# Altium PCB dev_board_3DM-CV7-AR.PcbDoc
Units mm, origin at the board's own origin, x right, y up, seen from the top; angles counter-clockwise.
Board outline 49.67 x 41.99 mm, 4 copper layers (F.Cu, In1.Cu, In2.Cu, B.Cu); 30 components, 27 nets, 122 pads, 7 vias.
Unrouted connection lines stored in the file: 9.
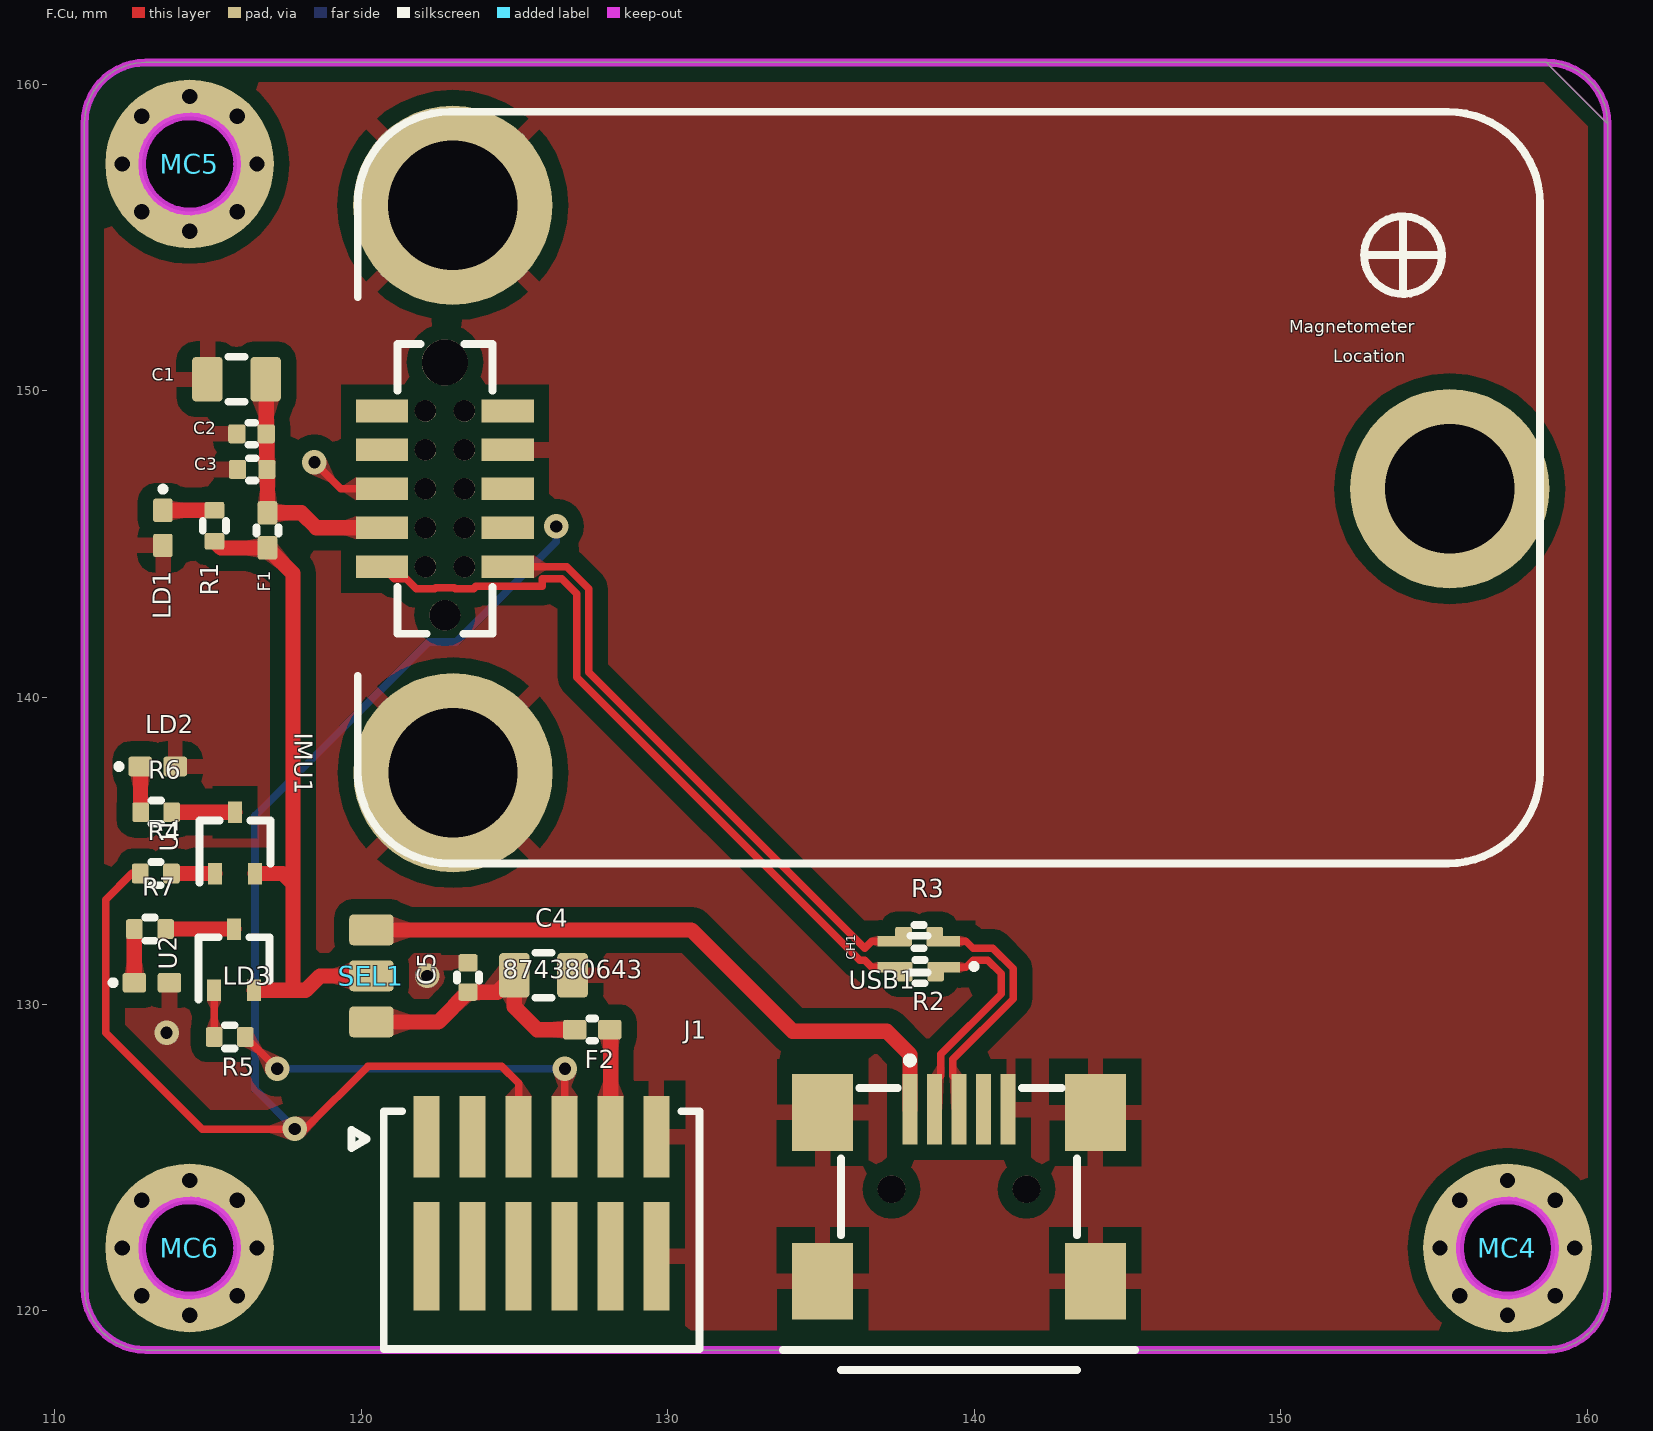
[diagram p0: F.Cu view]
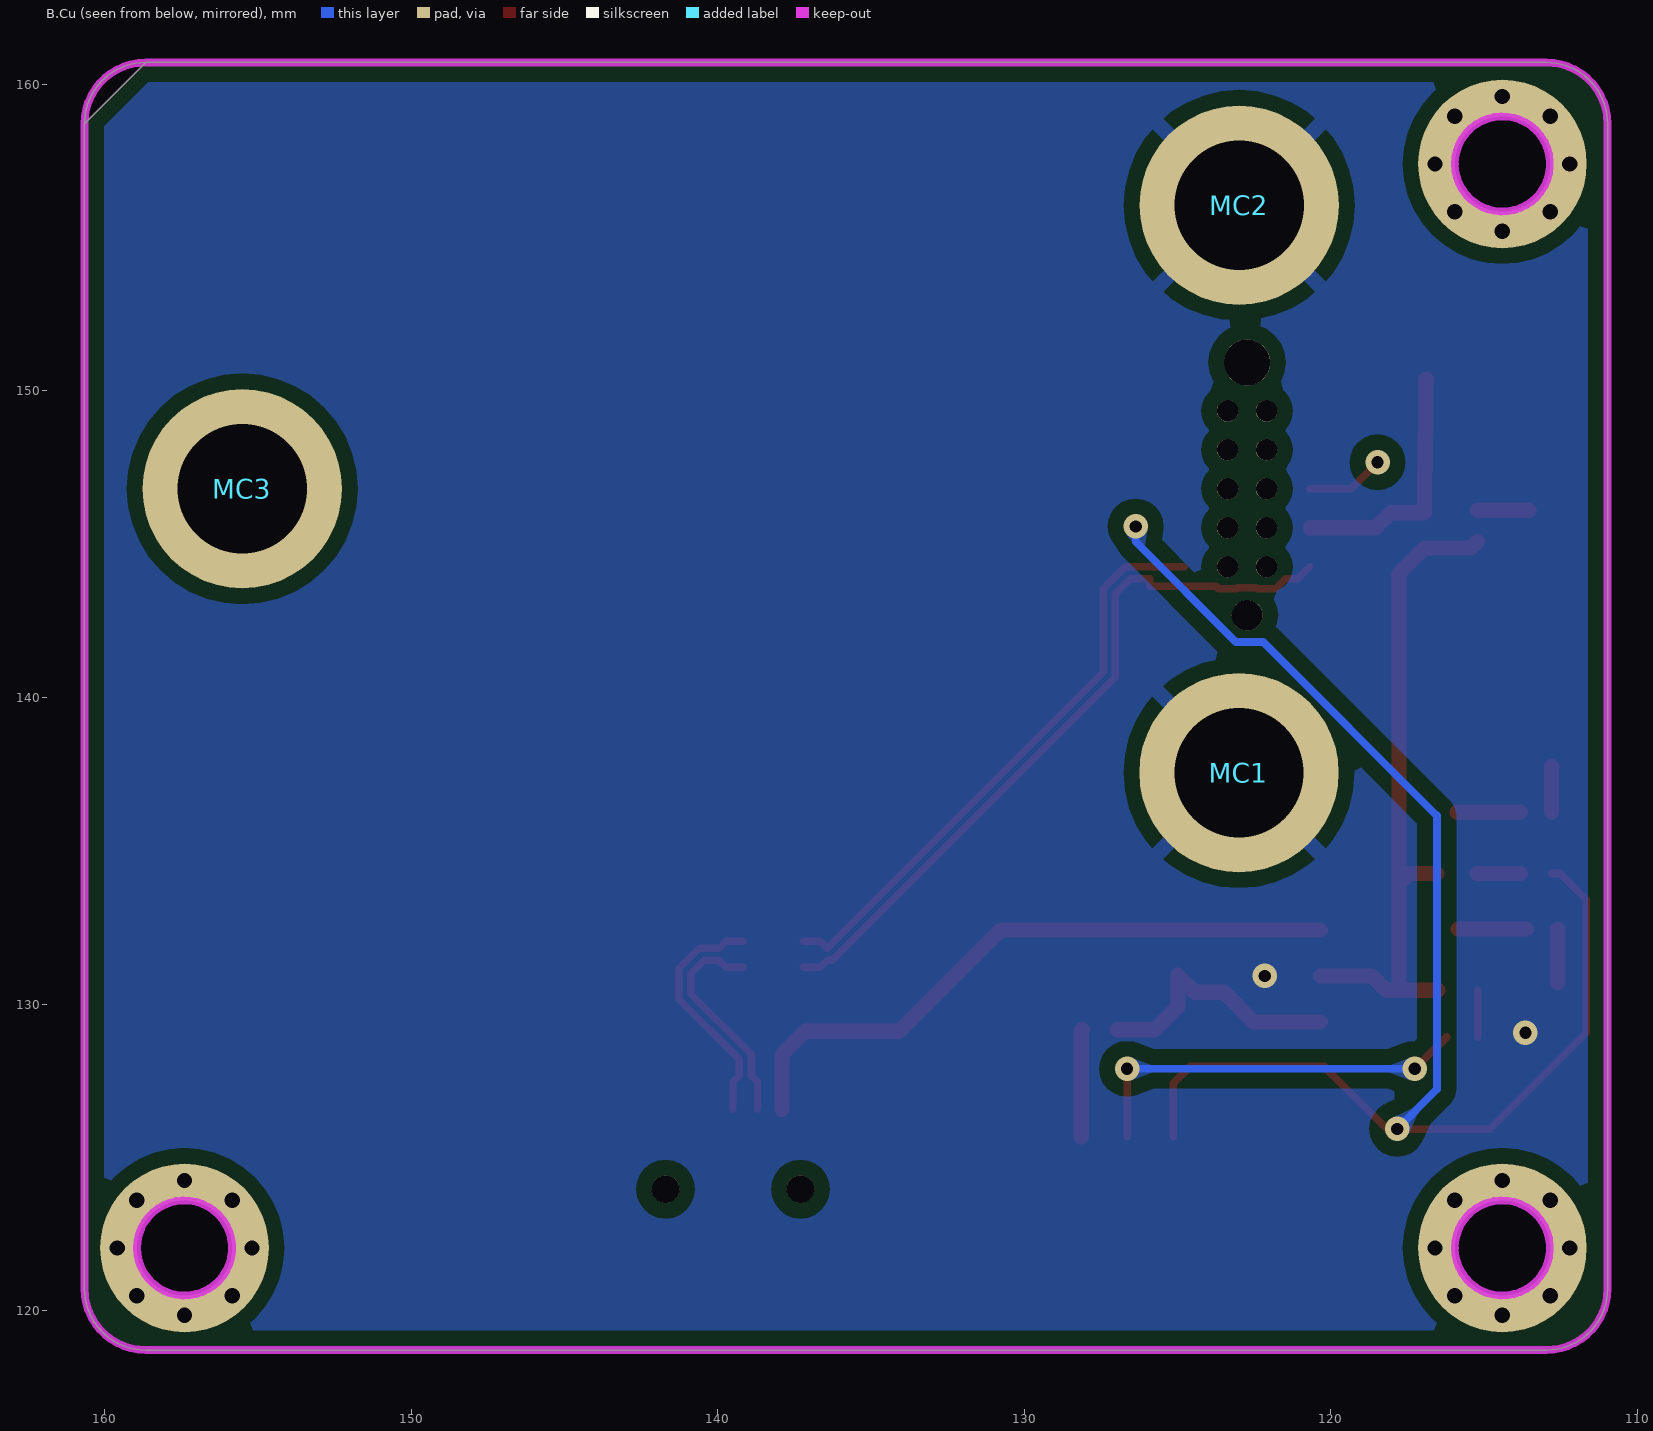
[diagram p1: B.Cu view, seen from below]
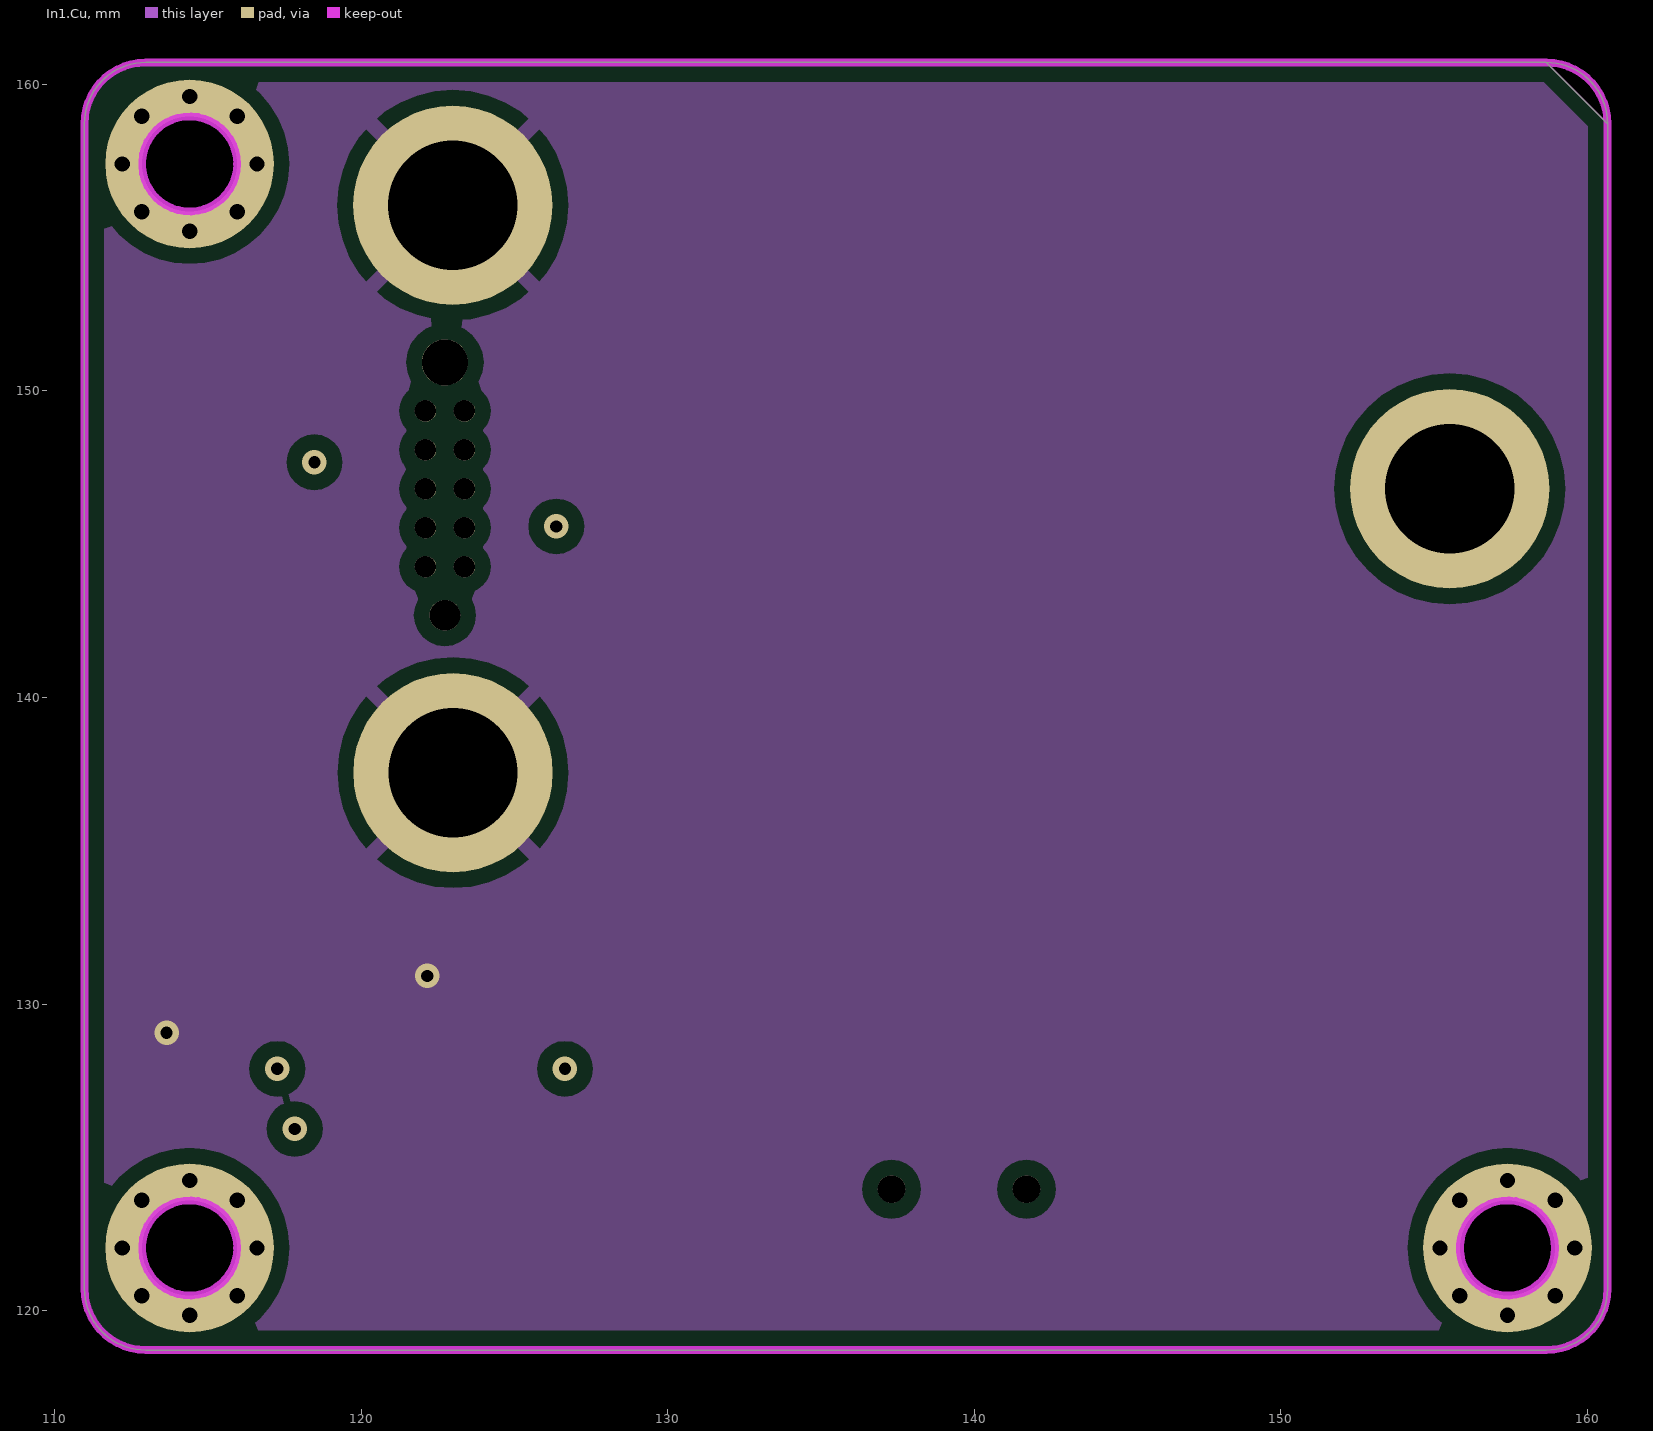
[diagram p2: In1.Cu]
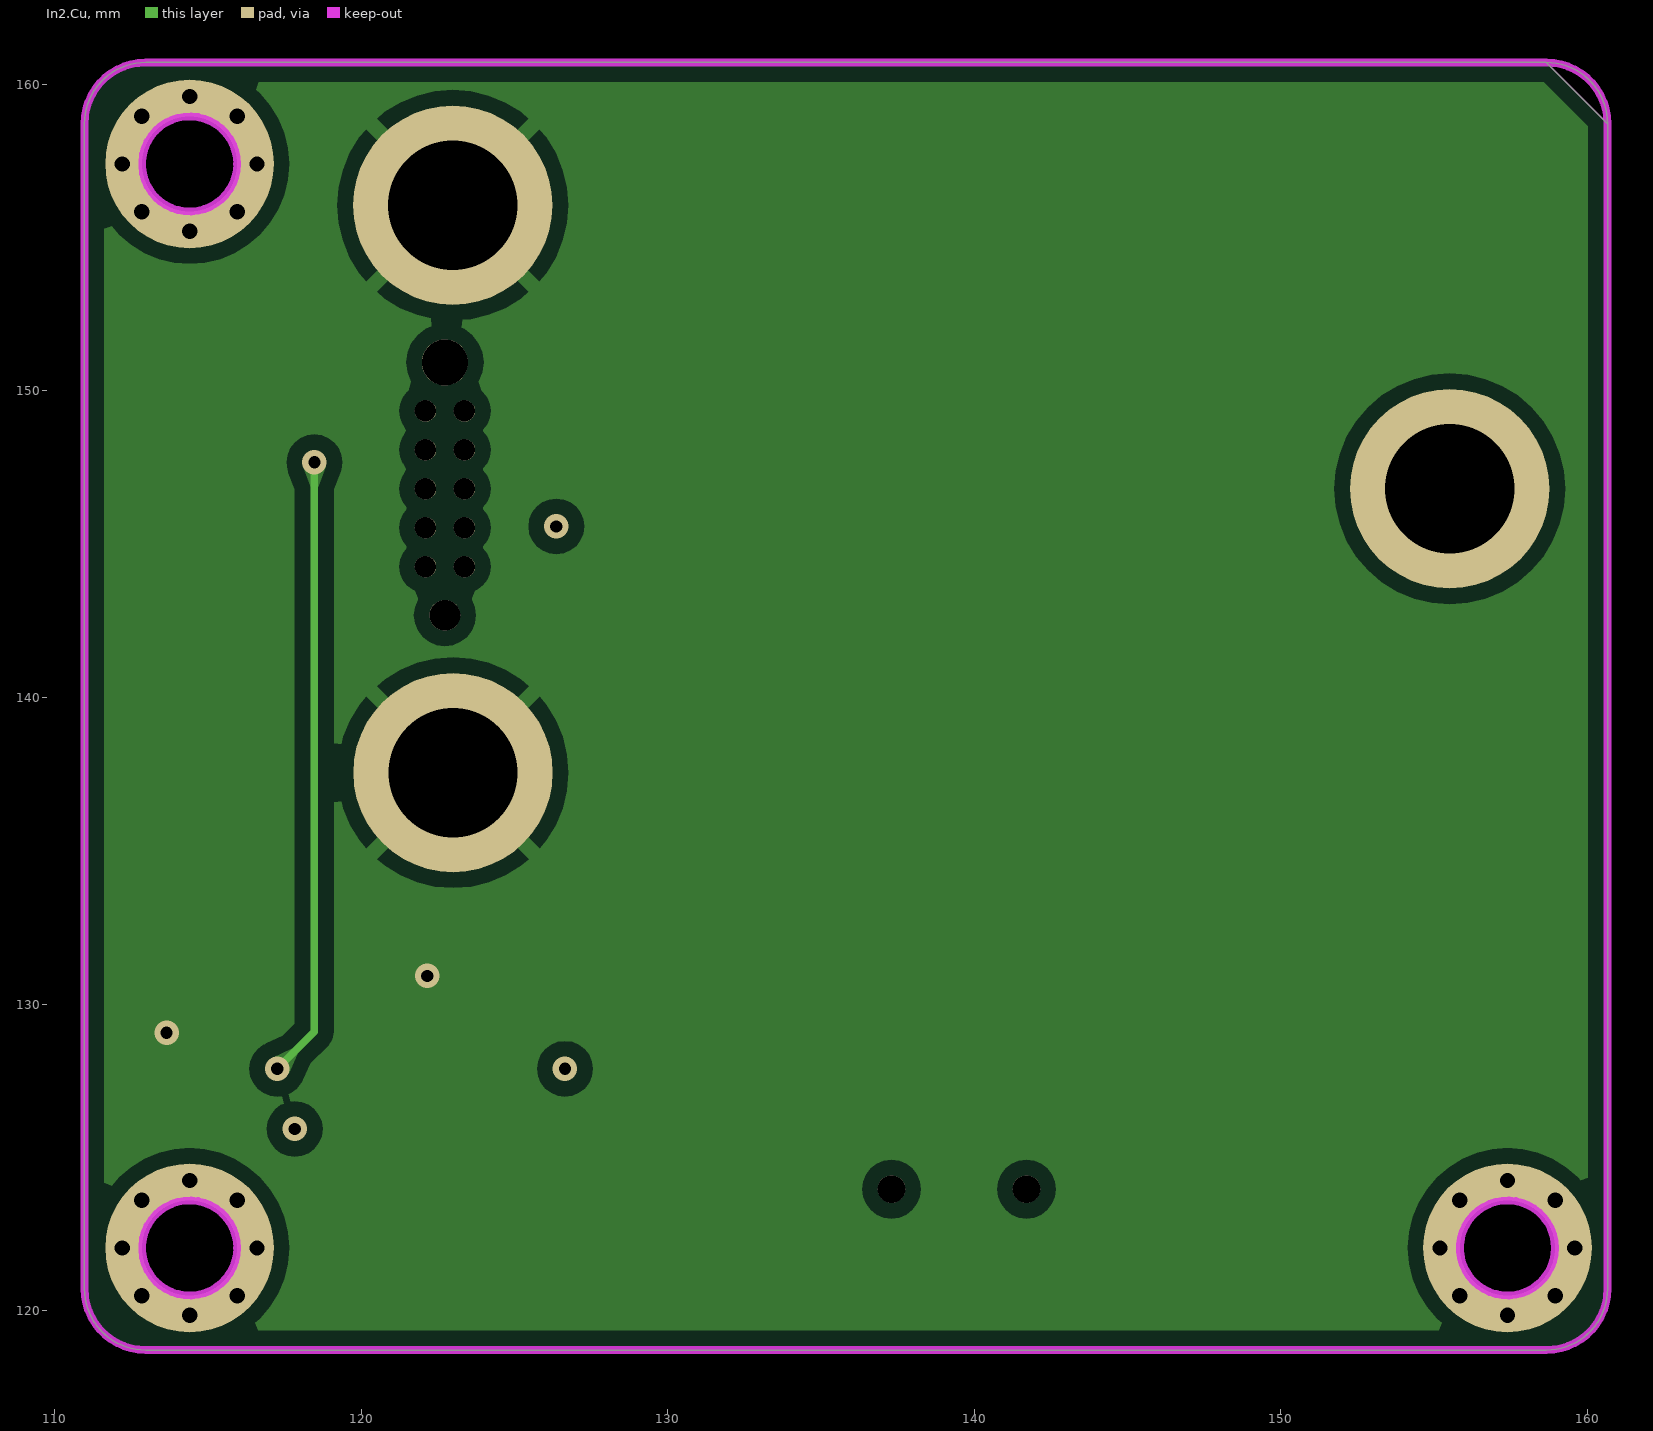
[diagram p3: In2.Cu]

## Layer stack, top to bottom
F.Mask: solder mask 0.0102, Solder Resist, Dk 3.5
F.Cu: signal copper 0.0356
Dielectric 1: dielectric 0.32, FR-4, Dk 4.8
In1.Cu: signal copper 0.0356
Dielectric2: dielectric 0.32, FR-4, Dk 4.8
In2.Cu: signal copper 0.0356
Dielectric3: dielectric 0.32, FR-4, Dk 4.8
B.Cu: signal copper 0.0356
B.Mask: solder mask 0.0102, Solder Resist, Dk 3.5

## Board outline
158.65,160.71 cw(c158.65,158.71) 160.65,158.71 160.65,120.72 cw(c158.65,120.72) 158.65,118.72 112.98,118.72 cw(c112.98,120.72) 110.98,120.72 110.98,158.71 cw(c112.98,158.71) 112.98,160.71 158.65,160.71 cw(c158.65,158.71) 158.65,160.71
cut-out: 115.653,156.471 115.705,156.535 115.849,156.804 115.938,157.096 115.967,157.4 115.938,157.704 115.849,157.996 115.705,158.265 115.511,158.501 115.339,158.643 115.275,158.695 115.006,158.839 114.714,158.928 114.41,158.958 114.106,158.928 113.814,158.839 113.545,158.695 113.309,158.501 113.167,158.329 113.115,158.265 112.971,157.996 112.882,157.704 112.852,157.4 112.882,157.096 112.971,156.804 113.115,156.535 113.309,156.299 113.481,156.157 113.545,156.105 113.814,155.961 114.106,155.872 114.41,155.843 114.714,155.872 115.006,155.961 115.275,156.105 115.511,156.299 115.653,156.471
cut-out: 115.48,120.923 115.511,120.949 115.705,121.185 115.849,121.454 115.938,121.746 115.967,122.05 115.938,122.354 115.849,122.646 115.705,122.915 115.537,123.12 115.511,123.151 115.275,123.345 115.006,123.489 114.714,123.578 114.41,123.607 114.106,123.578 113.814,123.489 113.545,123.345 113.34,123.177 113.309,123.151 113.115,122.915 112.971,122.646 112.882,122.354 112.852,122.05 112.882,121.746 112.971,121.454 113.115,121.185 113.283,120.98 113.309,120.949 113.545,120.755 113.814,120.611 114.106,120.522 114.41,120.492 114.714,120.522 115.006,120.611 115.275,120.755 115.48,120.923
cut-out: 158.614,121.105 158.679,121.185 158.823,121.454 158.912,121.746 158.942,122.05 158.912,122.354 158.823,122.646 158.679,122.915 158.486,123.151 158.329,123.28 158.25,123.345 157.98,123.489 157.688,123.578 157.384,123.607 157.081,123.578 156.788,123.489 156.519,123.345 156.283,123.151 156.154,122.995 156.089,122.915 155.945,122.646 155.857,122.354 155.827,122.05 155.857,121.746 155.945,121.454 156.089,121.185 156.283,120.949 156.44,120.82 156.519,120.755 156.788,120.611 157.081,120.522 157.384,120.492 157.688,120.522 157.98,120.611 158.25,120.755 158.486,120.949 158.614,121.105

## Design rules (kind name [scope] priority, off if disabled: settings)
Clearance "Clearence 0,5_Polygon" [InNamedPolygon('F.Cu-GND') OR InNamedPolygon('In1.Cu-GND') OR InNamedPolygon('In2.Cu-GND') OR InNamedPolygon('B.Cu-GND')] p1: gap=0.5 ignorepadtopadclearanceinfootprint=FALSE
MinimumSolderMaskSliver [All] p1: minsoldermaskwidth=0
PolygonConnect Polygon_B.Cu-/Rx-1_ConnectDirect [IsNamedPolygon('B.Cu-/Rx-1')] p1: connectstyle=Direct reliefconductorwidth=0.254 reliefentries=4 polygonreliefangle="90 Angle" airgapwidth=0.254
PolygonConnect Polygon_B.Cu-/Tx-1_ConnectDirect [IsNamedPolygon('B.Cu-/Tx-1')] p2: connectstyle=Direct reliefconductorwidth=0.254 reliefentries=4 polygonreliefangle="90 Angle" airgapwidth=0.254
PolygonConnect Polygon_B.Cu-/Tx_ConnectDirect [IsNamedPolygon('B.Cu-/Tx')] p3: connectstyle=Direct reliefconductorwidth=0.254 reliefentries=4 polygonreliefangle="90 Angle" airgapwidth=0.254
PolygonConnect Polygon_B.Cu-/Rx_ConnectDirect [IsNamedPolygon('B.Cu-/Rx')] p4: connectstyle=Direct reliefconductorwidth=0.254 reliefentries=4 polygonreliefangle="90 Angle" airgapwidth=0.254
PolygonConnect Polygon_In2.Cu-/Tx-1_ConnectDirect [IsNamedPolygon('In2.Cu-/Tx-1')] p5: connectstyle=Direct reliefconductorwidth=0.254 reliefentries=4 polygonreliefangle="90 Angle" airgapwidth=0.254
PolygonConnect Polygon_In2.Cu-/Tx_ConnectDirect [IsNamedPolygon('In2.Cu-/Tx')] p6: connectstyle=Direct reliefconductorwidth=0.254 reliefentries=4 polygonreliefangle="90 Angle" airgapwidth=0.254
PolygonConnect Polygon_B.Cu-GND_ConnectDirect [IsNamedPolygon('B.Cu-GND') vs IsVia] p7: connectstyle=Direct reliefconductorwidth=0.254 reliefentries=4 polygonreliefangle="90 Angle" airgapwidth=0.254
PolygonConnect Polygon_B.Cu-GND_ConnectRelief45 [IsNamedPolygon('B.Cu-GND') vs (IsThruPin or IsSMTPin) and (PadShape_AllLayers = 'Round')] p8: connectstyle=Relief reliefconductorwidth=0.5 reliefentries=4 polygonreliefangle="45 Angle" airgapwidth=0.5
PolygonConnect Polygon_B.Cu-GND_ConnectRelief90 [IsNamedPolygon('B.Cu-GND') vs (IsThruPin or IsSMTPin) and (PadShape_AllLayers <> 'Round')] p9: connectstyle=Relief reliefconductorwidth=0.5 reliefentries=4 polygonreliefangle="90 Angle" airgapwidth=0.5
PolygonConnect Polygon_In2.Cu-GND_ConnectDirect [IsNamedPolygon('In2.Cu-GND') vs IsVia] p10: connectstyle=Direct reliefconductorwidth=0.254 reliefentries=4 polygonreliefangle="90 Angle" airgapwidth=0.254
PolygonConnect Polygon_In2.Cu-GND_ConnectRelief45 [IsNamedPolygon('In2.Cu-GND') vs (IsThruPin or IsSMTPin) and (PadShape_AllLayers = 'Round')] p11: connectstyle=Relief reliefconductorwidth=0.5 reliefentries=4 polygonreliefangle="45 Angle" airgapwidth=0.5
PolygonConnect Polygon_In2.Cu-GND_ConnectRelief90 [IsNamedPolygon('In2.Cu-GND') vs (IsThruPin or IsSMTPin) and (PadShape_AllLayers <> 'Round')] p12: connectstyle=Relief reliefconductorwidth=0.5 reliefentries=4 polygonreliefangle="90 Angle" airgapwidth=0.5
PolygonConnect Polygon_In1.Cu-GND_ConnectDirect [IsNamedPolygon('In1.Cu-GND') vs IsVia] p13: connectstyle=Direct reliefconductorwidth=0.254 reliefentries=4 polygonreliefangle="90 Angle" airgapwidth=0.254
PolygonConnect Polygon_In1.Cu-GND_ConnectRelief45 [IsNamedPolygon('In1.Cu-GND') vs (IsThruPin or IsSMTPin) and (PadShape_AllLayers = 'Round')] p14: connectstyle=Relief reliefconductorwidth=0.5 reliefentries=4 polygonreliefangle="45 Angle" airgapwidth=0.5
PolygonConnect Polygon_In1.Cu-GND_ConnectRelief90 [IsNamedPolygon('In1.Cu-GND') vs (IsThruPin or IsSMTPin) and (PadShape_AllLayers <> 'Round')] p15: connectstyle=Relief reliefconductorwidth=0.5 reliefentries=4 polygonreliefangle="90 Angle" airgapwidth=0.5
PolygonConnect Polygon_F.Cu-GND_ConnectDirect [IsNamedPolygon('F.Cu-GND') vs IsVia] p16: connectstyle=Direct reliefconductorwidth=0.254 reliefentries=4 polygonreliefangle="90 Angle" airgapwidth=0.254
PolygonConnect Polygon_F.Cu-GND_ConnectRelief45 [IsNamedPolygon('F.Cu-GND') vs (IsThruPin or IsSMTPin) and (PadShape_AllLayers = 'Round')] p17: connectstyle=Relief reliefconductorwidth=0.5 reliefentries=4 polygonreliefangle="45 Angle" airgapwidth=0.5
PolygonConnect Polygon_F.Cu-GND_ConnectRelief90 [IsNamedPolygon('F.Cu-GND') vs (IsThruPin or IsSMTPin) and (PadShape_AllLayers <> 'Round')] p18: connectstyle=Relief reliefconductorwidth=0.5 reliefentries=4 polygonreliefangle="90 Angle" airgapwidth=0.5
PolygonConnect Polygon_F.Cu-/Rx-2_ConnectDirect [IsNamedPolygon('F.Cu-/Rx-2')] p19: connectstyle=Direct reliefconductorwidth=0.254 reliefentries=4 polygonreliefangle="90 Angle" airgapwidth=0.254
PolygonConnect Polygon_F.Cu-+5V-5_ConnectDirect [IsNamedPolygon('F.Cu-+5V-5')] p20: connectstyle=Direct reliefconductorwidth=0.254 reliefentries=4 polygonreliefangle="90 Angle" airgapwidth=0.254
PolygonConnect Polygon_F.Cu-Net-(IMU1-VCC)-7_ConnectDirect [IsNamedPolygon('F.Cu-Net-(IMU1-VCC)-7')] p21: connectstyle=Direct reliefconductorwidth=0.254 reliefentries=4 polygonreliefangle="90 Angle" airgapwidth=0.254
PolygonConnect Polygon_F.Cu-/D_conn--1_ConnectDirect [IsNamedPolygon('F.Cu-/D_conn--1')] p22: connectstyle=Direct reliefconductorwidth=0.254 reliefentries=4 polygonreliefangle="90 Angle" airgapwidth=0.254
PolygonConnect Polygon_F.Cu-+5V-4_ConnectDirect [IsNamedPolygon('F.Cu-+5V-4')] p23: connectstyle=Direct reliefconductorwidth=0.254 reliefentries=4 polygonreliefangle="90 Angle" airgapwidth=0.254
PolygonConnect Polygon_F.Cu-Net-(IMU1-VCC)-6_ConnectDirect [IsNamedPolygon('F.Cu-Net-(IMU1-VCC)-6')] p24: connectstyle=Direct reliefconductorwidth=0.254 reliefentries=4 polygonreliefangle="90 Angle" airgapwidth=0.254
PolygonConnect Polygon_F.Cu-/Tx-5_ConnectDirect [IsNamedPolygon('F.Cu-/Tx-5')] p25: connectstyle=Direct reliefconductorwidth=0.254 reliefentries=4 polygonreliefangle="90 Angle" airgapwidth=0.254
PolygonConnect Polygon_F.Cu-+5VD-2_ConnectDirect [IsNamedPolygon('F.Cu-+5VD-2')] p26: connectstyle=Direct reliefconductorwidth=0.254 reliefentries=4 polygonreliefangle="90 Angle" airgapwidth=0.254
PolygonConnect Polygon_F.Cu-/D+-1_ConnectDirect [IsNamedPolygon('F.Cu-/D+-1')] p27: connectstyle=Direct reliefconductorwidth=0.254 reliefentries=4 polygonreliefangle="90 Angle" airgapwidth=0.254
PolygonConnect Polygon_F.Cu-/D_conn-_ConnectDirect [IsNamedPolygon('F.Cu-/D_conn-')] p28: connectstyle=Direct reliefconductorwidth=0.254 reliefentries=4 polygonreliefangle="90 Angle" airgapwidth=0.254
PolygonConnect Polygon_F.Cu-/D_conn+-1_ConnectDirect [IsNamedPolygon('F.Cu-/D_conn+-1')] p29: connectstyle=Direct reliefconductorwidth=0.254 reliefentries=4 polygonreliefangle="90 Angle" airgapwidth=0.254
PolygonConnect Polygon_F.Cu-+5V-3_ConnectDirect [IsNamedPolygon('F.Cu-+5V-3')] p30: connectstyle=Direct reliefconductorwidth=0.254 reliefentries=4 polygonreliefangle="90 Angle" airgapwidth=0.254
PolygonConnect Polygon_F.Cu-/Tx-4_ConnectDirect [IsNamedPolygon('F.Cu-/Tx-4')] p31: connectstyle=Direct reliefconductorwidth=0.254 reliefentries=4 polygonreliefangle="90 Angle" airgapwidth=0.254
PolygonConnect Polygon_F.Cu-/D_conn+_ConnectDirect [IsNamedPolygon('F.Cu-/D_conn+')] p32: connectstyle=Direct reliefconductorwidth=0.254 reliefentries=4 polygonreliefangle="90 Angle" airgapwidth=0.254
PolygonConnect Polygon_F.Cu-Net-(LD1-A)_ConnectDirect [IsNamedPolygon('F.Cu-Net-(LD1-A)')] p33: connectstyle=Direct reliefconductorwidth=0.254 reliefentries=4 polygonreliefangle="90 Angle" airgapwidth=0.254
PolygonConnect Polygon_F.Cu-Net-(IMU1-VCC)-5_ConnectDirect [IsNamedPolygon('F.Cu-Net-(IMU1-VCC)-5')] p34: connectstyle=Direct reliefconductorwidth=0.254 reliefentries=4 polygonreliefangle="90 Angle" airgapwidth=0.254
PolygonConnect Polygon_F.Cu-Net-(LD3-A)_ConnectDirect [IsNamedPolygon('F.Cu-Net-(LD3-A)')] p35: connectstyle=Direct reliefconductorwidth=0.254 reliefentries=4 polygonreliefangle="90 Angle" airgapwidth=0.254
PolygonConnect Polygon_F.Cu-VBUS_ConnectDirect [IsNamedPolygon('F.Cu-VBUS')] p36: connectstyle=Direct reliefconductorwidth=0.254 reliefentries=4 polygonreliefangle="90 Angle" airgapwidth=0.254
PolygonConnect Polygon_F.Cu-Net-(J1-Pin_5)-1_ConnectDirect [IsNamedPolygon('F.Cu-Net-(J1-Pin_5)-1')] p37: connectstyle=Direct reliefconductorwidth=0.254 reliefentries=4 polygonreliefangle="90 Angle" airgapwidth=0.254
PolygonConnect Polygon_F.Cu-/Rx-1_ConnectDirect [IsNamedPolygon('F.Cu-/Rx-1')] p38: connectstyle=Direct reliefconductorwidth=0.254 reliefentries=4 polygonreliefangle="90 Angle" airgapwidth=0.254
PolygonConnect Polygon_F.Cu-/D-_ConnectDirect [IsNamedPolygon('F.Cu-/D-')] p39: connectstyle=Direct reliefconductorwidth=0.254 reliefentries=4 polygonreliefangle="90 Angle" airgapwidth=0.254
PolygonConnect Polygon_F.Cu-Net-(IMU1-VCC)-4_ConnectDirect [IsNamedPolygon('F.Cu-Net-(IMU1-VCC)-4')] p40: connectstyle=Direct reliefconductorwidth=0.254 reliefentries=4 polygonreliefangle="90 Angle" airgapwidth=0.254
PolygonConnect Polygon_F.Cu-Net-(IMU1-VCC)-3_ConnectDirect [IsNamedPolygon('F.Cu-Net-(IMU1-VCC)-3')] p41: connectstyle=Direct reliefconductorwidth=0.254 reliefentries=4 polygonreliefangle="90 Angle" airgapwidth=0.254
PolygonConnect Polygon_F.Cu-Net-(J1-Pin_5)_ConnectDirect [IsNamedPolygon('F.Cu-Net-(J1-Pin_5)')] p42: connectstyle=Direct reliefconductorwidth=0.254 reliefentries=4 polygonreliefangle="90 Angle" airgapwidth=0.254
PolygonConnect Polygon_F.Cu-Net-(IMU1-VCC)-2_ConnectDirect [IsNamedPolygon('F.Cu-Net-(IMU1-VCC)-2')] p43: connectstyle=Direct reliefconductorwidth=0.254 reliefentries=4 polygonreliefangle="90 Angle" airgapwidth=0.254
PolygonConnect Polygon_F.Cu-+5V-2_ConnectDirect [IsNamedPolygon('F.Cu-+5V-2')] p44: connectstyle=Direct reliefconductorwidth=0.254 reliefentries=4 polygonreliefangle="90 Angle" airgapwidth=0.254
PolygonConnect Polygon_F.Cu-/Tx-3_ConnectDirect [IsNamedPolygon('F.Cu-/Tx-3')] p45: connectstyle=Direct reliefconductorwidth=0.254 reliefentries=4 polygonreliefangle="90 Angle" airgapwidth=0.254
PolygonConnect Polygon_F.Cu-+5V-1_ConnectDirect [IsNamedPolygon('F.Cu-+5V-1')] p46: connectstyle=Direct reliefconductorwidth=0.254 reliefentries=4 polygonreliefangle="90 Angle" airgapwidth=0.254
PolygonConnect Polygon_F.Cu-/Rx_ConnectDirect [IsNamedPolygon('F.Cu-/Rx')] p47: connectstyle=Direct reliefconductorwidth=0.254 reliefentries=4 polygonreliefangle="90 Angle" airgapwidth=0.254
PolygonConnect Polygon_F.Cu-Net-(U2-G)-1_ConnectDirect [IsNamedPolygon('F.Cu-Net-(U2-G)-1')] p48: connectstyle=Direct reliefconductorwidth=0.254 reliefentries=4 polygonreliefangle="90 Angle" airgapwidth=0.254
PolygonConnect Polygon_F.Cu-/Tx-2_ConnectDirect [IsNamedPolygon('F.Cu-/Tx-2')] p49: connectstyle=Direct reliefconductorwidth=0.254 reliefentries=4 polygonreliefangle="90 Angle" airgapwidth=0.254
PolygonConnect Polygon_F.Cu-Net-(IMU1-VCC)-1_ConnectDirect [IsNamedPolygon('F.Cu-Net-(IMU1-VCC)-1')] p50: connectstyle=Direct reliefconductorwidth=0.254 reliefentries=4 polygonreliefangle="90 Angle" airgapwidth=0.254
PolygonConnect Polygon_F.Cu-/Tx-1_ConnectDirect [IsNamedPolygon('F.Cu-/Tx-1')] p51: connectstyle=Direct reliefconductorwidth=0.254 reliefentries=4 polygonreliefangle="90 Angle" airgapwidth=0.254
PolygonConnect Polygon_F.Cu-/D+_ConnectDirect [IsNamedPolygon('F.Cu-/D+')] p52: connectstyle=Direct reliefconductorwidth=0.254 reliefentries=4 polygonreliefangle="90 Angle" airgapwidth=0.254
PolygonConnect Polygon_F.Cu-Net-(U2-G)_ConnectDirect [IsNamedPolygon('F.Cu-Net-(U2-G)')] p53: connectstyle=Direct reliefconductorwidth=0.254 reliefentries=4 polygonreliefangle="90 Angle" airgapwidth=0.254
PolygonConnect Polygon_F.Cu-+5VD-1_ConnectDirect [IsNamedPolygon('F.Cu-+5VD-1')] p54: connectstyle=Direct reliefconductorwidth=0.254 reliefentries=4 polygonreliefangle="90 Angle" airgapwidth=0.254
PolygonConnect Polygon_F.Cu-+5V_ConnectDirect [IsNamedPolygon('F.Cu-+5V')] p55: connectstyle=Direct reliefconductorwidth=0.254 reliefentries=4 polygonreliefangle="90 Angle" airgapwidth=0.254
PolygonConnect Polygon_F.Cu-Net-(LD2-A)_ConnectDirect [IsNamedPolygon('F.Cu-Net-(LD2-A)')] p56: connectstyle=Direct reliefconductorwidth=0.254 reliefentries=4 polygonreliefangle="90 Angle" airgapwidth=0.254
PolygonConnect Polygon_F.Cu-Net-(IMU1-VCC)_ConnectDirect [IsNamedPolygon('F.Cu-Net-(IMU1-VCC)')] p57: connectstyle=Direct reliefconductorwidth=0.254 reliefentries=4 polygonreliefangle="90 Angle" airgapwidth=0.254
PolygonConnect Polygon_F.Cu-/Tx_ConnectDirect [IsNamedPolygon('F.Cu-/Tx')] p58: connectstyle=Direct reliefconductorwidth=0.254 reliefentries=4 polygonreliefangle="90 Angle" airgapwidth=0.254
PolygonConnect Polygon_F.Cu-+5VD_ConnectDirect [IsNamedPolygon('F.Cu-+5VD')] p59: connectstyle=Direct reliefconductorwidth=0.254 reliefentries=4 polygonreliefangle="90 Angle" airgapwidth=0.254
RoutingVias [All] p1: holewidth=0.711 width=1.27 viastyle="Through Hole" minholewidth=0.711 minwidth=1.27 maxholewidth=0.711 maxwidth=1.27
SilkToSilkClearance [All] p1: silktosilkclearance=0
SilkToSolderMaskClearance [IsPad] p1: minsilkscreentomaskgap=0 clearancetoexposedcopper=TRUE
SolderMaskExpansion [All] p1: expansion=0.102 istentingtop=FALSE
Width [All] p1: maxlimit=10 minlimit=0.254 preferedwidth=0.254 midlayer1_maxwidth=0.254 minimp=50.000000 maximp=50.000000 favimp=50.000000
27 further rules are at their usual default settings.

## Components (designator, comment, footprint, x,y, rotation, side; value= is the part's Value field where it differs from the comment)
C1 "0.1uF" C_0805_2012Metric 115.94,150.38 r180 top
C2 "0.1uF" C_0402_1005Metric 116.43,148.6 r180 top
C3 "10pf" C_0402_1005Metric 116.45,147.44 r180 top
C4 "0.1uF" C_0805_2012Metric 125.949,130.941 r0 top
C5 "0.1uF" C_0402_1005Metric 123.49,130.87 r90 top
CH1 "~" XFMR_CM0805D900R-10 138.19,131.63 r180 top
F1 "~" L_0402_1005Metric_Pad0.77x0.64mm_HandSolder 116.95,145.45 r90 top
F2 "~" L_0402_1005Metric_Pad0.77x0.64mm_HandSolder 127.54,129.17 r180 top
IMU1 "SMD" 3DM-CV7 122.99,137.56 r0 top
J1 "87438-0643" Molex_picoSPOX_87438-3.5A_1x6_P1.5mm_Horizontal 125.949,130.941 r0 top
LD1 "LED_Generic" LED_0402_1005Metric_Pad0.77x0.64mm_HandSolder 113.54,145.53 r270 top
LD2 "LED_Generic" LED_0402_1005Metric_Pad0.77x0.64mm_HandSolder 113.37,137.75 r0 top
LD3 "LED_Generic" LED_0402_1005Metric_Pad0.77x0.64mm_HandSolder 113.18,130.7 r0 top
MC1 "M2.5_2mm_Insert" SMTSOB-M25-2ET 122.99,137.56 r0 bottom
MC2 "M2.5_2mm_Insert" SMTSOB-M25-2ET 122.98,156.061 r0 bottom
MC3 "M2.5_2mm_Insert" SMTSOB-M25-2ET 155.492,146.815 r0 bottom
MC4 "M3_Hole" M3_Hole 157.384,122.05 r0 top
MC5 "M3_Hole" M3_Hole 114.41,157.4 r0 top
MC6 "M3_Hole" M3_Hole 114.41,122.05 r0 top
R1 "1.0K" R_0402_1005Metric 115.22,145.6 r270 top
R2 "0" R_0402_1005Metric 138.23,131.06 r180 top
R3 "0" R_0402_1005Metric 138.2,132.2 r180 top
R4 "0" R_0402_1005Metric 113.31,134.26 r0 top
R5 "0" R_0402_1005Metric 115.72,128.93 r180 top
R6 "1.0K" R_0402_1005Metric 113.32,136.26 r0 top
R7 "1.0K" R_0402_1005Metric 113.12,132.45 r0 top
SEL1 "~" pad_selector 120.34,130.92 r90 top
U1 "DMP2240UW" SOT-323_SC-70 115.89,135.26 r90 top
U2 "DMP2240UW" SOT-323_SC-70 115.86,131.45 r90 top
USB1 "1734328-1" TE_1734328-1 139.5,126.467 r0 top

## Footprints (in the part's own frame and the unit in brackets; to place one, negate y for a bottom-side part, rotate by r counter-clockwise, add the part's x,y. Pads: shape width x height; smd on the part's side, far side on the other; paste and mask are expansions set on the pad)
3DM-CV7 [mm]
  rect 1.7x0.74 smd mask+0: 1(-2.304,6.706) 2(1.796,6.706) 3(-2.304,7.976) 4(1.796,7.976) 5(-2.304,9.246) 6(1.796,9.246) 7(-2.304,10.516) 8(1.796,10.516) 9(-2.304,11.786) 10(1.796,11.786)
  round 0.7 hole 0.7 paste-2539.97 mask+0: Un1(-0.889,11.786) Un2(-0.889,10.516) Un3(-0.889,9.246) Un4(-0.889,7.976) Un5(-0.889,6.706) Un8(0.381,11.786) Un9(0.381,10.516) Un10(0.381,9.246) Un11(0.381,7.976) Un12(0.381,6.706)
  round 1.5 hole 1.5 paste-2539.97 mask+0: Un6(-0.254,13.366)
  round 1 hole 1 paste-2539.97 mask+0: Un7(-0.254,5.126)
  silkscreen extent -3.1,-2.97 35.46,21.54
C_0402_1005Metric [mm]
  rrect25% 0.56x0.62 smd mask+0: 1(-0.48,0) 2(0.48,0)
  silkscreen extent -0.11,-0.36 0.11,0.36
C_0805_2012Metric [mm]
  rrect25% 1x1.45 smd mask+0: 1(-0.95,0) 2(0.95,0)
  silkscreen extent -0.26,-0.73 0.26,0.73
L_0402_1005Metric_Pad0.77x0.64mm_HandSolder [mm]
  rrect25% 0.765x0.64 smd mask+0: 1(-0.573,0) 2(0.573,0)
  silkscreen extent -0.1,-0.36 0.1,0.36
LED_0402_1005Metric_Pad0.77x0.64mm_HandSolder [mm]
  rrect25% 0.765x0.64 smd mask+0: 1(-0.573,0) 2(0.573,0)
  silkscreen extent -1.31,-0.05 -1.22,0.05
M3_Hole [mm]
  round 0.7 hole 0.5 paste-2539.97 mask+0: 1(-2.2,0) 1(-1.556,-1.556) 1(-1.556,1.556) 1(0,-2.2) 1(0,2.2) 1(1.556,-1.556) 1(1.556,1.556) 1(2.2,0)
  round 5.5 hole 3.1 paste-2539.97 mask+0: 1(0,0)
Molex_picoSPOX_87438-3.5A_1x6_P1.5mm_Horizontal [mm]
  rect 0.85x3.55 smd mask-3.55: 1(-3.809,-9.161) 2(-2.309,-9.161) 3(-0.809,-9.161) 4(0.691,-9.161) 5(2.191,-9.161) 6(3.691,-9.161)
  rect 0.85x2.65 smd mask-2.65: 1(-3.809,-5.261) 2(-2.309,-5.261) 3(-0.809,-5.261) 4(0.691,-5.261) 5(2.191,-5.261) 6(3.691,-5.261)
  silkscreen extent -6.26,-12.19 5.09,-4.44
pad_selector [mm]
  rrect25% 1x1.45 smd mask+0: 1(-1.5,0) 2(1.5,0) 3(0,0)
R_0402_1005Metric [mm]
  rrect25% 0.54x0.64 smd mask+0: 1(-0.51,0) 2(0.51,0)
  silkscreen extent -0.15,-0.38 0.15,0.38
SMTSOB-M25-2ET [mm]
  round 6.5 hole 4.22 paste-2539.97 mask+0: 1(0.01,0.01)
SOT-323_SC-70 [mm]
  rect 0.7x0.45 smd mask+0: 1(-1,0.65) 2(-1,-0.65) 3(1,0)
  silkscreen extent -1.3,-1.16 0.73,1.16
TE_1734328-1 [mm]
  rect 0.5x2.3 smd mask+0.102: 1(-1.6,0.1) 2(-0.8,0.1) 3(0,0.1) 4(0.8,0.1) 5(1.6,0.1)
  rect 2x2.5 smd mask+0.102: 6(-4.45,0) 7(-4.45,-5.5) 8(4.45,-5.5) 9(4.45,0)
  round 0.9 hole 0.9 paste-2539.97 mask+0: Un1(-2.2,-2.5) Un2(2.2,-2.5)
  silkscreen extent -5.75,-8.4 5.75,1.8
XFMR_CM0805D900R-10 [mm]
  rect 0.75x0.35 smd mask+0.102: 1(-0.975,0.425) 2(-0.975,-0.425) 3(0.975,-0.425) 4(0.975,0.425)
  silkscreen extent -1.85,-0.6 0.28,0.6

## Part data
C1 C4: library part C_0805_2012Metric, "Capacitor SMD 0805 (2012 Metric), square (rectangular) end terminal, IPC_7351 nominal, (Body size source: IPC-SM-782 page 76, https://www.pcb-3d.com/wordpress/wp-content/uploads/ipc-sm-782a_amendment_1_and_2.pdf, https://docs.google.com/spreadsheets/d/1BsfQQcO9C6DZCsRaXUlFlo91Tg2WpOkGARC1WS5S8t0/edit?usp=sharing), generated with kicad-footprint-generator", Voltage=16v, Sheetfile=dev_board_3DM-CV7-AR.kicad_sch
C2 C3 C5: library part C_0402_1005Metric, "Capacitor SMD 0402 (1005 Metric), square (rectangular) end terminal, IPC_7351 nominal, (Body size source: IPC-SM-782 page 76, https://www.pcb-3d.com/wordpress/wp-content/uploads/ipc-sm-782a_amendment_1_and_2.pdf), generated with kicad-footprint-generator", Voltage=16v, Sheetfile=dev_board_3DM-CV7-AR.kicad_sch
CH1: library part XFMR_CM0805D900R-10, Sheetfile=dev_board_3DM-CV7-AR.kicad_sch
F1 F2: library part L_0402_1005Metric_Pad0.77x0.64mm_HandSolder, "Inductor SMD 0402 (1005 Metric), square (rectangular) end terminal, IPC_7351 nominal with elongated pad for handsoldering. (Body size source: http://www.tortai-tech.com/upload/download/2011102023233369053.pdf), generated with kicad-footprint-generator", Sheetfile=dev_board_3DM-CV7-AR.kicad_sch
IMU1: library part 3DM-CV7, Sheetfile=dev_board_3DM-CV7-AR.kicad_sch
J1: library part Molex_picoSPOX_87438-3.5A_1x6_P1.5mm_Horizontal, "Molex_picoSPOX_87438-3.5A_1x6_P1.5mm_Horizontal", MPN=87438-0643, Sheetfile=dev_board_3DM-CV7-AR.kicad_sch, ki_description=Molex_picoSPOX_87438-3.5A_1x6_P1.5mm_Horizontal
LD1 LD2 LD3: library part LED_0402_1005Metric_Pad0.77x0.64mm_HandSolder, "LED SMD 0402 (1005 Metric), square (rectangular) end terminal, IPC_7351 nominal, (Body size source: http://www.tortai-tech.com/upload/download/2011102023233369053.pdf), generated with kicad-footprint-generator", Sheetfile=dev_board_3DM-CV7-AR.kicad_sch
MC1 MC2 MC3: library part SMTSOB-M25-2ET, Sheetfile=dev_board_3DM-CV7-AR.kicad_sch
R1 R2 R3 R4 R5 R6 R7: library part R_0402_1005Metric, "Resistor SMD 0402 (1005 Metric), square (rectangular) end terminal, IPC_7351 nominal, (Body size source: IPC-SM-782 page 72, https://www.pcb-3d.com/wordpress/wp-content/uploads/ipc-sm-782a_amendment_1_and_2.pdf), generated with kicad-footprint-generator", Sheetfile=dev_board_3DM-CV7-AR.kicad_sch, Size=0402
SEL1: library part pad_selector, Sheetfile=dev_board_3DM-CV7-AR.kicad_sch
U1 U2: library part SOT-323_SC-70, "SOT-323, SC-70", Sheetfile=dev_board_3DM-CV7-AR.kicad_sch, ki_description="P-Channel Enhancement FET SOT-323"
USB1: library part TE_1734328-1, Sheetfile=dev_board_3DM-CV7-AR.kicad_sch
MC4 MC5 MC6: Sheetfile=dev_board_3DM-CV7-AR.kicad_sch

## Via types
v1: diameter 0.8, hole 0.4, F.Cu to B.Cu, tented both sides, 7 vias

## Nets (pads, with @x,y where several pads share a name; then routed paths per layer and width w, separated by ;. In a path a pad name is that pad's centre, name@x,y a point inside that pad or via, vN(x,y) a via of type N, cw(c..) or ccw(c..) an arc to the next point about the centre after c; other vN are vias at no path point)
+5V: C4.1 C5.1 F2.2 SEL1.1 | length 8.6
  F.Cu w0.5: SEL1.1 122.52,129.42 C5.1 124.448,130.39 C4.1 124.999,129.911 125.74,129.17 F2.2
+5VD: F1.1 R1.2 SEL1.3 U1.2 U2.2 | length 22
  F.Cu w0.5: R1.2 115.432,144.878 F1.1 117.78,144.047 117.78,133.93 ; U2.2 118.19,130.45 118.66,130.92 SEL1.3 ; U1.2 117.45,134.26 117.78,133.93 ; 117.76,130.45 117.78,130.47 117.78,133.93
D+: CH1.3 IMU1.2 R3.2 | length 19.3
  F.Cu w0.242: IMU1.2 126.713,144.266 127.427,143.552 127.427,140.822 136.422,131.827 136.425,131.827 136.652,132.055 CH1.3
D-: CH1.4 IMU1.1 R2.2 | length 24
  F.Cu w0.242: IMU1.1 121.08,143.871 121.476,143.871 121.802,143.545 122.4,143.545 122.435,143.58 123.037,143.58 123.072,143.545 123.67,143.545 123.747,143.622 125.909,143.622 125.909,143.871 126.55,143.871 127.033,143.388 127.033,140.658 136.258,131.433 136.425,131.433 136.652,131.205 CH1.4
D_conn+: CH1.2 R3.1 USB1.3 | length 8
  F.Cu w0.242: CH1.2 139.728,132.055 139.955,131.827 140.602,131.827 141.267,131.162 141.267,130.168 139.297,128.198 139.297,127.67 139.5,127.467 USB1.3
D_conn-: CH1.1 R2.1 USB1.2 | length 7.3
  F.Cu w0.242: USB1.2 138.7,127.467 138.903,127.67 138.903,128.362 140.873,130.332 140.873,130.999 140.439,131.433 139.955,131.433 139.728,131.205 CH1.1
GND: C1.2 C2.2 C3.2 C4.2 C5.2 IMU1.8 J1.6 LD1.2 LD2.2 LD3.2 MC1.1 MC2.1 MC4.1 MC5.1 MC6.1 USB1.5 USB1.6 USB1.7 USB1.8 USB1.9
  other v1: 113.66,129.07 122.16,130.92
Net-(IMU1-VCC): C1.1 C2.1 C3.1 F1.2 IMU1.3 | length 8.3
  F.Cu w0.5: C1.1 116.91,150.36 C2.1 116.93,148.58 C3.1 116.95,147.42 F1.2 118.058,146.022 118.544,145.536 IMU1.3
Net-(J1-Pin_5): F2.1 J1.5 | length 3.5
  F.Cu w0.5: F2.1 128.14,129.143 J1.5@128.14,125.68
Net-(LD1-A): LD1.1 R1.1 | length 1.7
  F.Cu w0.5: LD1.1 115.213,146.102 R1.1
Net-(LD2-A): LD2.1 R6.1 | length 1.5
  F.Cu w0.5: LD2.1 112.81,137.737 R6.1
Net-(LD3-A): LD3.1 R7.1 | length 1.8
  F.Cu w0.5: LD3.1 112.61,130.702 R7.1
Net-(U1-D): R6.2 U1.3 | length 2.1
  F.Cu w0.5: R6.2 U1.3
Net-(U1-G): R4.2 U1.1 | length 1.4
  F.Cu w0.5: R4.2 U1.1
Net-(U2-D): R7.2 U2.3 | length 2.2
  F.Cu w0.5: R7.2 U2.3
Net-(U2-G): R5.2 U2.1 | length 1.5
  F.Cu w0.25: R5.2 U2.1
Rx: IMU1.4 J1.3 R4.1 | length 48.2
  F.Cu w0.25: R4.1 112.53,134.26 111.67,133.4 111.67,129.07 114.82,125.92 117.83,125.92 v1(117.84,125.93) 117.85,125.92 118.17,125.92 120.23,127.98 124.58,127.98 125.14,127.42 J1.3@125.14,125.68
  B.Cu w0.25: v1(117.84,125.93) 116.545,127.225 116.545,136.151 122.205,141.811 123.098,141.811 126.37,145.082 v1(126.37,145.58)
Tx: IMU1.5 J1.4 R5.1 | length 35.9
  F.Cu w0.25: R5.1 v1(117.27,127.89) ; v1(118.48,147.67) 119.344,146.806 IMU1.5 ; J1.4@126.64,125.68 126.64,127.88 v1(126.65,127.89)
  In2.Cu w0.25: v1(117.27,127.89) 118.48,129.1 v1(118.48,147.67)
  B.Cu w0.25: v1(117.27,127.89) v1(126.65,127.89)
unconnected-(IMU1-GPIO1-Pad7): IMU1.7
unconnected-(IMU1-GPIO2-Pad9): IMU1.9
unconnected-(IMU1-GPIO3-Pad6): IMU1.6
unconnected-(IMU1-GPIO4-Pad10): IMU1.10
unconnected-(J1-Pin_1-Pad1): J1.1
unconnected-(J1-Pin_2-Pad2): J1.2
unconnected-(MC3-Pad1): MC3.1
unconnected-(USB1-ID-Pad4): USB1.4
VBUS: SEL1.2 USB1.1 | length 21
  F.Cu w0.5: SEL1.2 130.77,132.42 134.07,129.12 137.14,129.12 137.9,128.36 USB1.1
pads on no net: IMU1.Un1 IMU1.Un2 IMU1.Un3 IMU1.Un4 IMU1.Un5 IMU1.Un6 IMU1.Un7 IMU1.Un8 IMU1.Un9 IMU1.Un10 IMU1.Un11 IMU1.Un12 USB1.Un1 USB1.Un2

## Polygon pours and split planes (outlines as drawn)
GND on F.Cu "F.Cu-GND" (solid, remove dead copper, pour order 30092): 109.18,162.83 109.18,115.17 163.18,115.76 163.48,163.03
Rx on F.Cu "F.Cu-/Rx-2" (solid, remove dead copper, pour order 30068): 117.042,126.045 117.042,125.795 117.687,125.56 117.841,125.93 117.687,126.3
+5V on F.Cu "F.Cu-+5V-5" (solid, remove dead copper, pour order 30059): 124.96,129.597 125.313,129.95 125.48,130.371 124.998,130.942 124.572,130.29
Net-(IMU1-VCC) on F.Cu "F.Cu-Net-(IMU1-VCC)-7" (solid, remove dead copper, pour order 30079): 117.59,145.772 117.59,146.272 117.234,146.342 116.949,146.022 117.234,145.703
D_conn- on F.Cu "F.Cu-/D_conn--1" (solid, remove dead copper, pour order 30090): 139.715,131.084 139.715,131.326 139.54,131.38 139.164,131.205 139.54,131.03
+5V on F.Cu "F.Cu-+5V-4" (solid, remove dead copper, pour order 30055): 121.565,129.17 121.565,129.67 120.911,129.901 120.339,129.42 120.911,128.939
Net-(IMU1-VCC) on F.Cu "F.Cu-Net-(IMU1-VCC)-6" (solid, remove dead copper, pour order 30060): 119.466,145.786 119.466,145.286 119.836,145.166 120.687,145.536 119.836,145.906
Tx on F.Cu "F.Cu-/Tx-5" (solid, remove dead copper, pour order 30050): 126.765,127.43 126.515,127.43 126.215,127.005 126.64,125.679 127.065,127.005
+5VD on F.Cu "F.Cu-+5VD-2" (solid, remove dead copper, pour order 30078): 116.31,145.127 116.31,144.627 116.666,144.557 116.951,144.878 116.666,145.197
D+ on F.Cu "F.Cu-/D+-1" (solid, remove dead copper, pour order 30062): 126.006,144.145 126.006,144.387 125.636,144.636 124.785,144.266 125.636,143.896
D_conn- on F.Cu "F.Cu-/D_conn-" (solid, remove dead copper, pour order 30064): 139.024,127.967 138.782,127.967 138.614,127.717 138.7,126.567 138.95,126.549
D_conn+ on F.Cu "F.Cu-/D_conn+-1" (solid, remove dead copper, pour order 30063): 139.418,127.967 139.176,127.967 139.25,126.549 139.5,126.567 139.586,127.717
+5V on F.Cu "F.Cu-+5V-3" (solid, remove dead copper, pour order 30071): 126.265,129.42 126.265,128.92 126.745,128.85 126.968,129.17 126.745,129.49
Tx on F.Cu "F.Cu-/Tx-4" (solid, remove dead copper, pour order 30069): 126.515,127.092 126.765,127.092 127.02,127.737 126.65,127.891 126.28,127.737
D_conn+ on F.Cu "F.Cu-/D_conn+" (solid, remove dead copper, pour order 30091): 139.715,131.934 139.715,132.176 139.54,132.23 139.164,132.055 139.54,131.88
Net-(LD1-A) on F.Cu "F.Cu-Net-(LD1-A)" (solid, remove dead copper, pour order 30077): 114.18,145.852 114.18,146.352 113.824,146.422 113.539,146.102 113.824,145.782
Net-(IMU1-VCC) on F.Cu "F.Cu-Net-(IMU1-VCC)-5" (solid, remove dead copper, pour order 30072): 117.2,146.725 116.7,146.725 116.63,146.245 116.95,146.021 117.27,146.245
Net-(LD3-A) on F.Cu "F.Cu-Net-(LD3-A)" (solid, remove dead copper, pour order 30076): 112.86,131.34 112.36,131.34 112.289,130.984 112.607,130.699 112.929,130.983
VBUS on F.Cu "F.Cu-VBUS" (solid, remove dead copper, pour order 30056): 121.565,132.17 121.565,132.67 120.911,132.901 120.339,132.42 120.911,131.939
Net-(J1-Pin_5) on F.Cu "F.Cu-Net-(J1-Pin_5)-1" (solid, remove dead copper, pour order 30047): 128.39,127.43 127.89,127.43 127.715,127.005 128.14,125.679 128.565,127.005
Rx on F.Cu "F.Cu-/Rx-1" (solid, remove dead copper, pour order 30052): 125.221,127.515 125.045,127.339 124.715,127.005 125.141,125.679 125.56,127.005
D- on F.Cu "F.Cu-/D-" (solid, remove dead copper, pour order 30088): 136.665,131.326 136.665,131.084 136.84,131.03 137.216,131.205 136.84,131.38
Net-(IMU1-VCC) on F.Cu "F.Cu-Net-(IMU1-VCC)-4" (solid, remove dead copper, pour order 30082): 117.16,149.19 116.66,149.19 116.63,148.77 116.91,148.599 117.19,148.77
Net-(IMU1-VCC) on F.Cu "F.Cu-Net-(IMU1-VCC)-3" (solid, remove dead copper, pour order 30084): 116.68,148.01 117.18,148.01 117.19,148.43 116.91,148.601 116.637,148.396
Net-(J1-Pin_5) on F.Cu "F.Cu-Net-(J1-Pin_5)" (solid, remove dead copper, pour order 30074): 127.89,128.53 128.39,128.53 128.445,128.895 128.112,129.171 127.805,128.878
Net-(IMU1-VCC) on F.Cu "F.Cu-Net-(IMU1-VCC)-2" (solid, remove dead copper, pour order 30083): 116.7,146.85 117.2,146.85 117.21,147.27 116.93,147.441 116.657,147.236
+5V on F.Cu "F.Cu-+5V-2" (solid, remove dead copper, pour order 30081): 124.08,130.14 124.08,130.64 123.66,130.67 123.489,130.39 123.66,130.11
Tx on F.Cu "F.Cu-/Tx-3" (solid, remove dead copper, pour order 30085): 116.583,128.4 116.76,128.577 116.5,129.042 116.229,128.931 116.168,128.61
+5V on F.Cu "F.Cu-+5V-1" (solid, remove dead copper, pour order 30073): 122.864,130.118 123.218,129.764 123.606,130.11 123.491,130.391 123.18,130.476
Rx on F.Cu "F.Cu-/Rx" (solid, remove dead copper, pour order 30070): 118.601,126.174 118.425,126.351 117.84,126.33 117.839,125.929 118.123,125.647
Net-(U2-G) on F.Cu "F.Cu-Net-(U2-G)-1" (solid, remove dead copper, pour order 30087): 115.085,129.875 115.335,129.875 115.435,130.1 115.21,130.451 114.985,130.1
Tx on F.Cu "F.Cu-/Tx-2" (solid, remove dead copper, pour order 30067): 116.793,128.544 116.616,128.367 116.9,127.737 117.271,127.889 117.423,128.26
Net-(IMU1-VCC) on F.Cu "F.Cu-Net-(IMU1-VCC)-1" (solid, remove dead copper, pour order 30054): 116.66,149.155 117.16,149.155 117.371,149.809 116.89,150.381 116.409,149.809
Tx on F.Cu "F.Cu-/Tx-1" (solid, remove dead copper, pour order 30061): 119.466,146.931 119.466,146.681 119.836,146.436 120.687,146.806 119.836,147.176
D+ on F.Cu "F.Cu-/D+" (solid, remove dead copper, pour order 30089): 136.665,132.176 136.665,131.934 136.84,131.88 137.216,132.055 136.84,132.23
Net-(U2-G) on F.Cu "F.Cu-Net-(U2-G)" (solid, remove dead copper, pour order 30086): 115.335,129.52 115.085,129.52 114.95,129.167 115.21,128.929 115.47,129.167
+5VD on F.Cu "F.Cu-+5VD-1" (solid, remove dead copper, pour order 30057): 119.115,131.17 119.115,130.67 119.769,130.439 120.341,130.92 119.769,131.401
+5V on F.Cu "F.Cu-+5V" (solid, remove dead copper, pour order 30058): 124.026,130.64 124.026,130.14 124.738,130.218 125,130.941 124.499,131.232
Net-(LD2-A) on F.Cu "F.Cu-Net-(LD2-A)" (solid, remove dead copper, pour order 30075): 112.56,137.11 113.06,137.11 113.123,137.47 112.798,137.751 112.483,137.463
Net-(IMU1-VCC) on F.Cu "F.Cu-Net-(IMU1-VCC)" (solid, remove dead copper, pour order 30080): 117.18,148.03 116.68,148.03 116.65,147.61 116.93,147.439 117.21,147.61
Tx on F.Cu "F.Cu-/Tx" (solid, remove dead copper, pour order 30066): 118.957,147.016 119.134,147.193 118.85,147.823 118.479,147.671 118.327,147.3
+5VD on F.Cu "F.Cu-+5VD" (solid, remove dead copper, pour order 30065): 117.298,144.176 117.651,144.53 117.27,145.01 116.949,144.878 116.88,144.495
GND on In1.Cu "In1.Cu-GND" (solid, remove dead copper, pour order 30093): 109.18,162.83 109.18,115.17 163.18,115.76 163.48,163.03
Tx on In2.Cu "In2.Cu-/Tx-1" (solid, remove dead copper, pour order 30046): 118.355,146.87 118.605,146.87 118.85,147.517 118.48,147.671 118.11,147.517
Tx on In2.Cu "In2.Cu-/Tx" (solid, remove dead copper, pour order 30049): 117.924,128.367 117.747,128.544 117.117,128.26 117.269,127.889 117.64,127.737
GND on In2.Cu "In2.Cu-GND" (solid, remove dead copper, pour order 30094): 109.18,162.83 109.18,115.17 163.18,115.76 163.48,163.03
Rx on B.Cu "B.Cu-/Rx-1" (solid, remove dead copper, pour order 30051): 117.363,126.584 117.186,126.407 117.47,125.777 117.841,125.929 117.993,126.3
Tx on B.Cu "B.Cu-/Tx-1" (solid, remove dead copper, pour order 30048): 125.85,128.015 125.85,127.765 126.497,127.52 126.651,127.89 126.497,128.26
Tx on B.Cu "B.Cu-/Tx" (solid, remove dead copper, pour order 30045): 118.07,127.765 118.07,128.015 117.423,128.26 117.269,127.89 117.423,127.52
Rx on B.Cu "B.Cu-/Rx" (solid, remove dead copper, pour order 30053): 126.068,144.957 126.245,144.78 126.653,145.297 126.371,145.581 125.97,145.58
GND on B.Cu "B.Cu-GND" (solid, remove dead copper, pour order 30095): 109.18,162.83 109.18,115.17 163.18,115.76 163.48,163.03

## Keep-outs
Edge.Cuts:
  circle w0.254: c114.41,122.05 r1.55
  circle w0.254: c157.384,122.05 r1.55
  circle w0.254: c114.41,157.4 r1.55
  circle w0: c114.41,157.4 r1.55
  lines w0: 158.65,160.71 cw(c158.65,158.71) 160.65,158.71 ; 158.65,160.71 cw(c158.65,158.71) 160.65,158.71 ; 158.65,160.71 160.65,158.71 ; 158.65,160.71 112.98,160.71 ccw(c112.98,158.71) 110.98,158.71 110.98,120.72 ccw(c112.98,120.72) 112.98,118.72 158.65,118.72 ccw(c158.65,120.72) 160.65,120.72 160.65,158.71
  lines w0.254: 158.65,160.71 cw(c158.65,158.71) 160.65,158.71 ; 158.65,160.71 cw(c158.65,158.71) 160.65,158.71 ; 158.65,160.71 112.98,160.71 ccw(c112.98,158.71) 110.98,158.71 110.98,120.72 ccw(c112.98,120.72) 112.98,118.72 158.65,118.72 ccw(c158.65,120.72) 160.65,120.72 160.65,158.71

## Text inside footprints (layer, text, board x,y; h text height)
IMU1: F.SilkS "Location" at 151.706,150.78 h0.7; F.SilkS "Magnetometer" at 150.273,151.745 h0.7; User.3 "use non-ferromagnetic  or ferrous inserts for retention" at 126.43,138.177 h1
J1: F.SilkS "874380643" at 124.629,130.656 h1